# EAGLE board tiny20_2 (EAGLE 4.16)
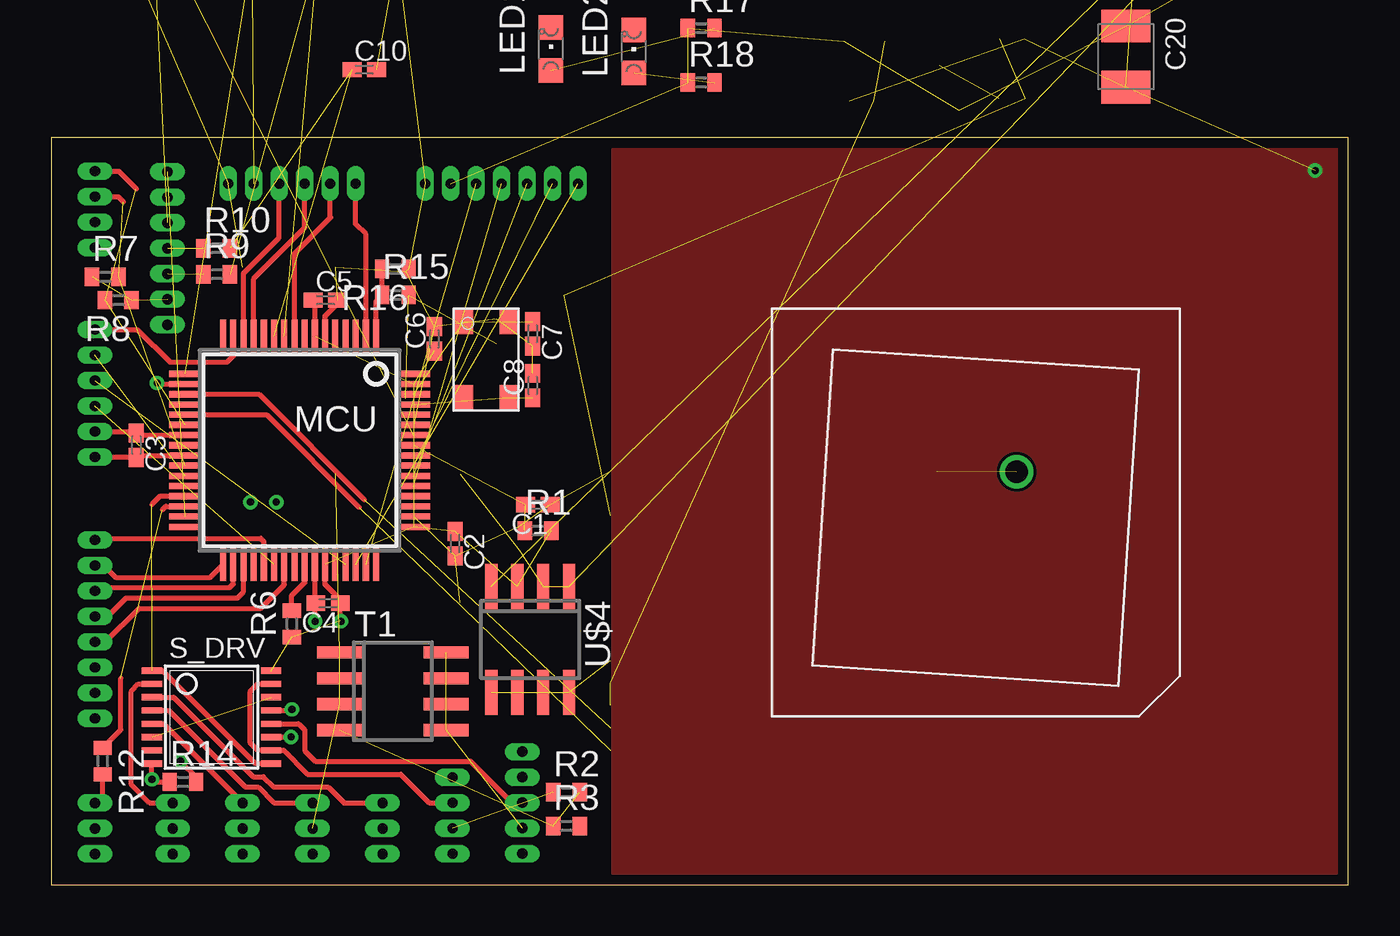
[diagram p0: board, top side]
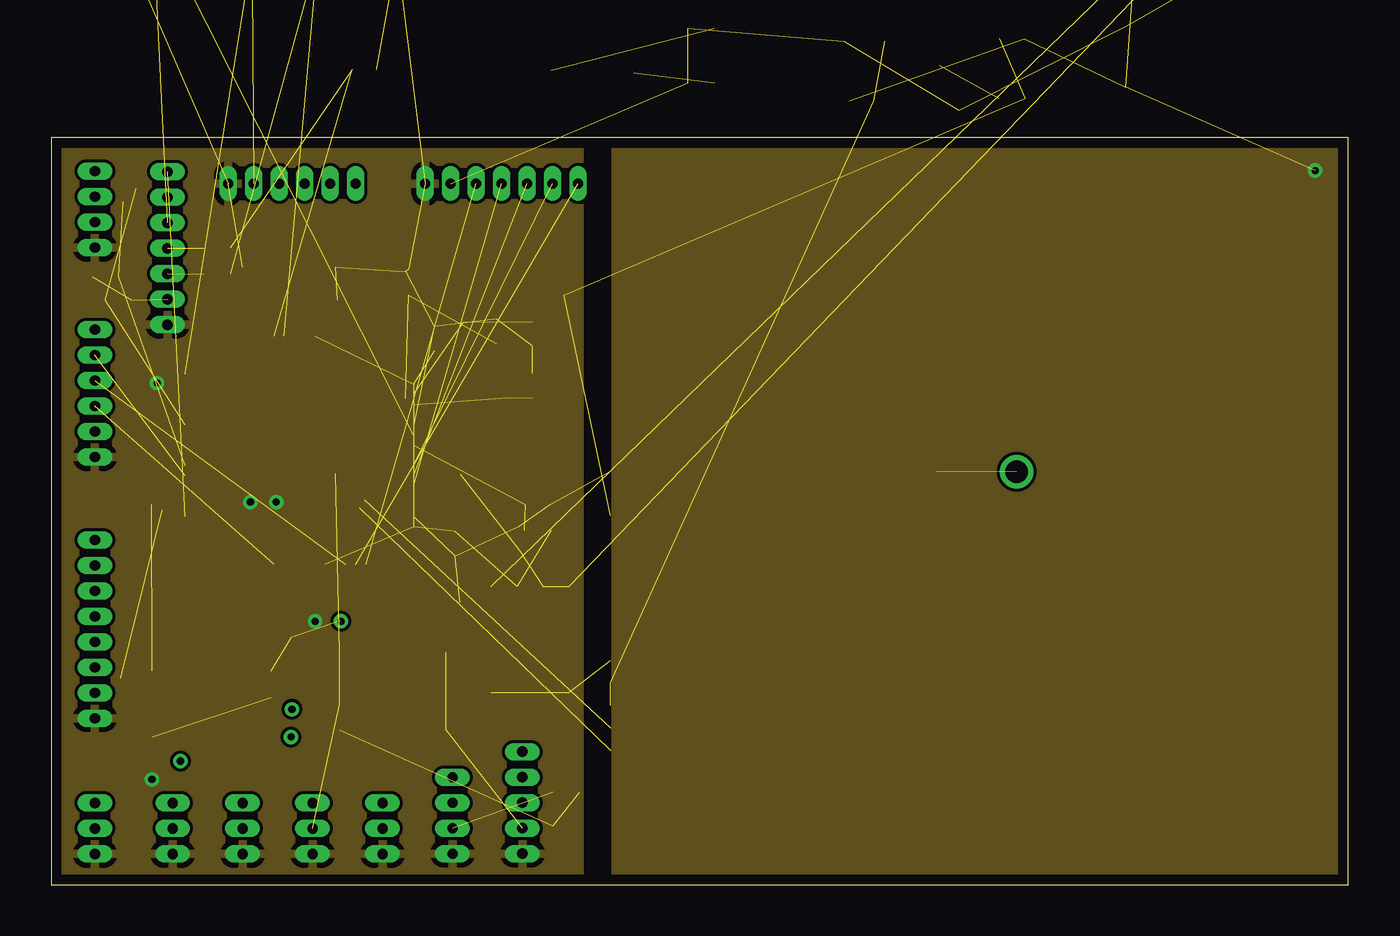
[diagram p1: board, inner layer Route2]
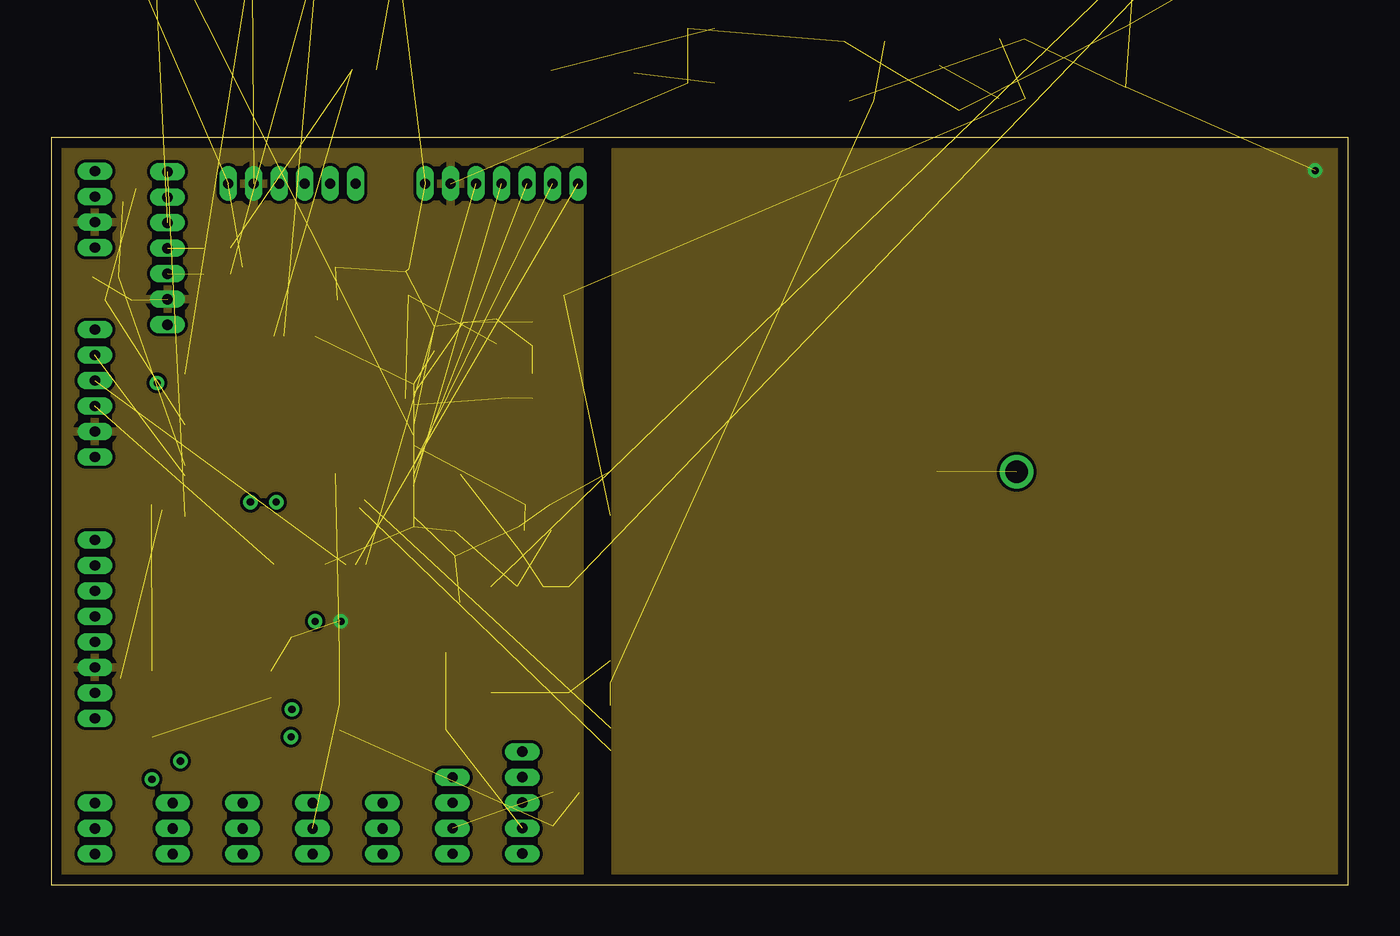
[diagram p2: board, inner layer Route15]
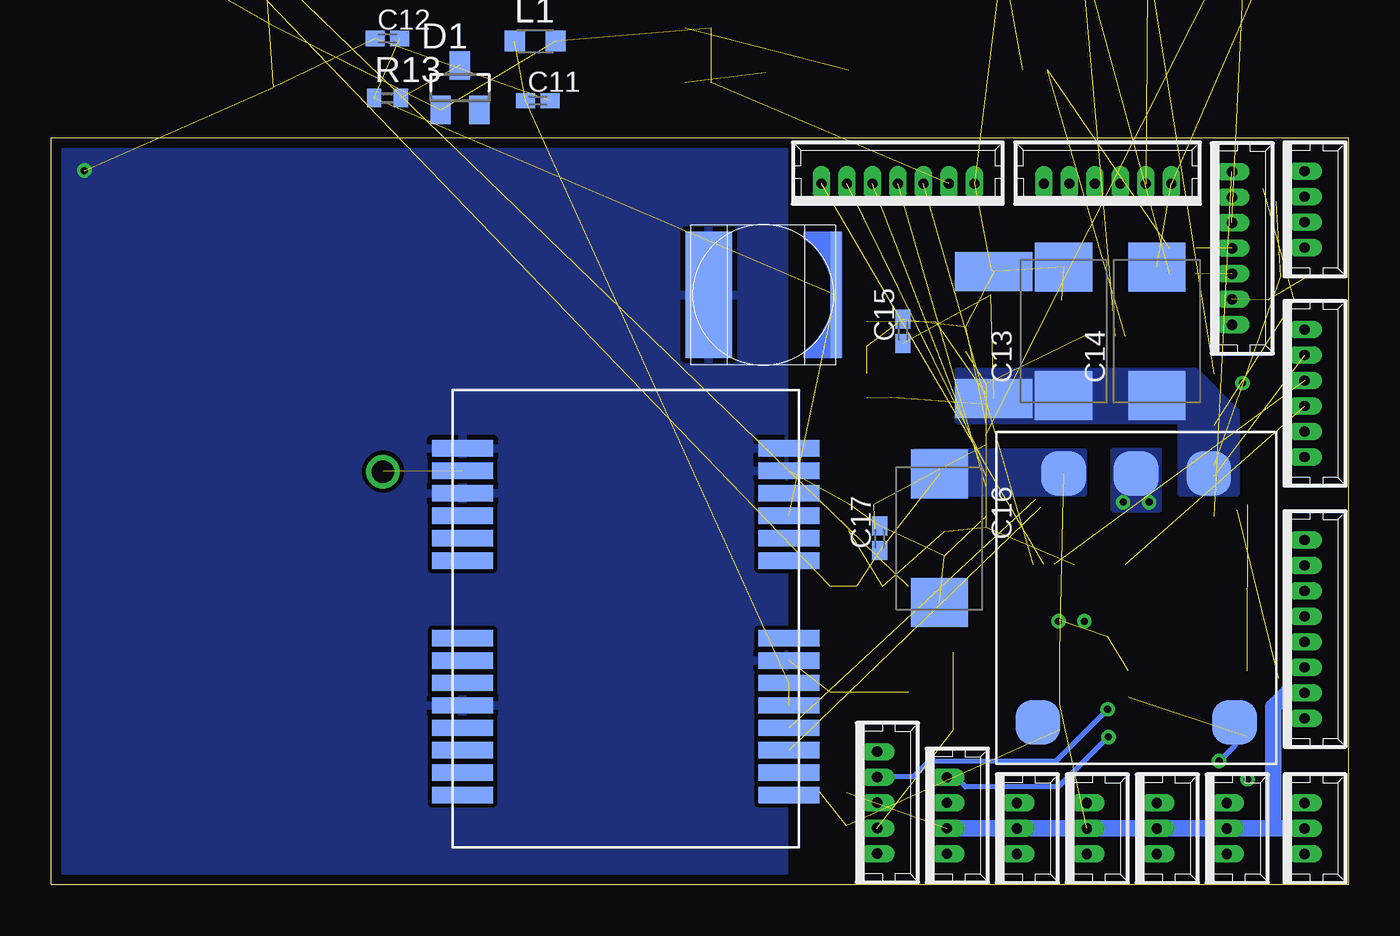
[diagram p3: board, bottom side, seen from below]

Size 63.61 x 36.63 mm. Coordinates in mm from the lower left corner, seen from the top.
Outline: 0,0 63.61,0 63.61,36.63 0,36.63 0,0
Copper layers (1*2+15*16): Top 0.035mm / dielectric 0.2mm / Route2 0.035mm / dielectric 1.5mm / Route15 0.035mm / dielectric 0.2mm / Bottom 0.035mm
Design rules "eurocircuits_verified_4l": minimum track width 0.15mm, minimum drill 0.35mm, track to track 0.15mm, track to pad 0.15mm, pad to pad 0.15mm, via to via 0.15mm, smd to smd 0.15mm, copper to edge 20mil, drill to drill 8mil, minimum pad ring 0.177mm, minimum via ring 0.177mm, stop-mask expansion 4mil, vias tented up to drill 0mil, thermal gap 10mil

## Footprints (pad centres in the part's own frame; a part is rotated, then mirrored left to right if it is on the bottom)
53047-06 = drill 0.5 pad 0.698 long: 1 3.125,0; 2 1.875,0; 3 0.625,0; 4 -0.625,0; 5 -1.875,0; 6 -3.125,0
C0402K = smd 0.925 x 0.74: 1 -0.6,0; 2 0.6,0
SMC_D = smd 2.4 x 2.8: + -3.15,0; - 3.15,0
SMC_B = smd 1.6 x 2.4: + -1.5,0; - 1.5,0
C0805K = smd 1.3 x 1.6: 1 -1,0; 2 1,0
SOT23 = smd 1 x 1.4: 1 -0.95,-1.1; 2 0.95,-1.1; 3 0,1.1
53047-04 = drill 0.5 pad 0.698 long: 1 1.875,0; 2 0.625,0; 3 -0.625,0; 4 -1.875,0
L2012C = smd 1 x 1: 1 -1,0; 2 1,0
CHIPLED_0805 = smd 1.2 x 1.2: A 0,-1.05; C 0,1.05
SQFP-S-10X10-64 = smd 0.3 x 1.6: 1 -3.75,-5.6; 2 -3.25,-5.6; 3 -2.75,-5.6; 4 -2.25,-5.6; 5 -1.75,-5.6; 6 -1.25,-5.6; 7 -0.75,-5.6; 8 -0.25,-5.6; 9 0.25,-5.6; 10 0.75,-5.6; 11 1.25,-5.6; 12 1.75,-5.6; 13 2.25,-5.6; 14 2.75,-5.6; 15 3.25,-5.6; 16 3.75,-5.6; 33 3.75,5.6; 34 3.25,5.6; 35 2.75,5.6; 36 2.25,5.6; 37 1.75,5.6; 38 1.25,5.6; 39 0.75,5.6; 40 0.25,5.6; 41 -0.25,5.6; 42 -0.75,5.6; 43 -1.25,5.6; 44 -1.75,5.6; 45 -2.25,5.6; 46 -2.75,5.6; 47 -3.25,5.6; 48 -3.75,5.6 | smd 1.6 x 0.3: 17 5.6,-3.75; 18 5.6,-3.25; 19 5.6,-2.75; 20 5.6,-2.25; 21 5.6,-1.75; 22 5.6,-1.25; 23 5.6,-0.75; 24 5.6,-0.25; 25 5.6,0.25; 26 5.6,0.75; 27 5.6,1.25; 28 5.6,1.75; 29 5.6,2.25; 30 5.6,2.75; 31 5.6,3.25; 32 5.6,3.75; 49 -5.6,3.75; 50 -5.6,3.25; 51 -5.6,2.75; 52 -5.6,2.25; 53 -5.6,1.75; 54 -5.6,1.25; 55 -5.6,0.75; 56 -5.6,0.25; 57 -5.6,-0.25; 58 -5.6,-0.75; 59 -5.6,-1.25; 60 -5.6,-1.75; 61 -5.6,-2.25; 62 -5.6,-2.75; 63 -5.6,-3.25; 64 -5.6,-3.75
SC59-BEC = smd 1 x 1.4: B -0.95,-1.2; C 0,1.2; E 0.95,-1.2
R0402 = smd 0.7 x 0.9: 1 -0.65,0; 2 0.65,0
R1005 = smd 0.7 x 0.9: 1 -0.65,0; 2 0.65,0
53047-03 = drill 0.5 pad 0.698 long: 1 1.25,0; 2 0,0; 3 -1.25,0
53047-05 = drill 0.5 pad 0.698 long: 1 2.5,0; 2 1.25,0; 3 0,0; 4 -1.25,0; 5 -2.5,0
TSSOP16 = smd 0.305 x 0.991: 1 -2.275,-2.918; 2 -1.625,-2.918; 3 -0.975,-2.918; 4 -0.325,-2.918; 5 0.325,-2.918; 6 0.975,-2.918; 7 1.625,-2.918; 8 2.275,-2.918; 9 2.275,2.918; 10 1.625,2.918; 11 0.975,2.918; 12 0.325,2.918; 13 -0.325,2.918; 14 -0.975,2.918; 15 -1.625,2.918; 16 -2.275,2.918
53047-08 = drill 0.5 pad 0.698 long: 1 4.375,0; 2 3.125,0; 3 1.875,0; 4 0.625,0; 5 -0.625,0; 6 -1.875,0; 7 -3.125,0; 8 -4.375,0
53047-07 = drill 0.5 pad 0.698 long: 1 3.75,0; 2 2.5,0; 3 1.25,0; 4 0,0; 5 -1.25,0; 6 -2.5,0; 7 -3.75,0
PTH = smd 2.184 x 2.184: P$1 -6.096,3.556; P$2 -6.096,0; P$3 -6.096,-3.556; P$4 6.096,4.826; P$5 6.096,-4.826
SOIC8 = smd 0.6 x 2.2: 1 -1.905,-2.6; 2 -0.635,-2.6; 3 0.635,-2.6; 4 1.905,-2.6; 5 1.905,2.6; 6 0.635,2.6; 7 -0.635,2.6; 8 -1.905,2.6
CTS_CRYSTAL = smd 1.2 x 0.9: P$1 -1.85,-1.1; P$2 1.85,-1.1; P$3 1.85,1.1; P$4 -1.85,1.1
LEA-LA = smd 3 x 0.8: 1 8,-8.65; 2 8,-7.55; 3 8,-6.45; 4 8,-5.35; 5 8,-4.25; 6 8,-3.15; 7 8,-2.05; 8 8,-0.95; 9 8,2.85; 10 8,3.95; 11 8,5.05; 12 8,6.15; 13 8,7.25; 14 8,8.35; 15 -8,8.35; 16 -8,7.25; 17 -8,6.15; 18 -8,5.05; 19 -8,3.95; 20 -8,2.85; 21 -8,-0.95; 22 -8,-2.05; 23 -8,-3.15; 24 -8,-4.25; 25 -8,-5.35; 26 -8,-6.45; 27 -8,-7.55; 28 -8,-8.65
PANA_J1_BIS = smd 6.2 x 2.3: MINUS 0,-2.794 | smd 6.198 x 0.508: PLUS 0,3.429
GPS_ANT_SMALL = drill 1.1 pad 1.4 round: P$1 -2,-2
SOLD_PAD_150_75 = smd 3.81 x 1.905: P$1 0,0

## Placement (x,y rotation side)
ANALOG1  [53047-06]  2.15,24.09 270 bottom
ANALOG2  [53047-06]  11.81,34.38 0 bottom
C1  100nF  [C0402K]  23.87,18.63 180 top
C2  100nF  [C0402K]  19.81,16.73 270 top
C3  100nF  [C0402K]  4.19,21.55 270 top
C4  100nF  [C0402K]  13.58,13.81 180 top
C5  100nF  [C0402K]  13.46,28.66 0 top
C6  100nF  [C0402K]  18.79,26.76 90 top
C7  22pF  [C0402K]  23.62,27.01 270 top
C8  22pF  [C0402K]  23.62,24.47 90 top
C9  18pF  [C0402K]  16.38,45.55 0 top  (outside the outline)
C10  18pF  [C0402K]  15.36,39.97 0 top  (outside the outline)
C11  100nF  [C0402K]  39.75,38.44 0 bottom
C12  18pF  [C0402K]  47.11,41.49 0 bottom  (outside the outline)
C13  47uF  [SMC_D]  13.97,27.14 90 bottom
C14  47uF  [SMC_D]  9.39,27.14 90 bottom
C15  100nF  [C0402K]  21.84,27.14 90 bottom
C16  100uF  [SMC_D]  20.06,16.98 270 bottom
C17  100nF  [C0402K]  22.98,16.98 90 bottom
C18  470pF  [C0402K]  52.45,43.9 0 top  (outside the outline)
C19  100nF  [C0402K]  58.67,45.17 0 top  (outside the outline)
C20  22uF  [SMC_B]  52.7,40.6 270 top
C21  1uF  [C0805K]  54.48,45.94 0 top  (outside the outline)
D1  BAS70  [SOT23]  43.56,39.08 0 bottom
I2C  [53047-04]  2.15,33.11 270 bottom
L1  0.47uH  [L2012C]  39.87,41.36 0 bottom  (outside the outline)
LED1  [CHIPLED_0805]  24.51,40.98 0 top  (outside the outline)
LED2  [CHIPLED_0805]  28.57,40.86 0 top  (outside the outline)
MCU  LPC2148  [SQFP-S-10X10-64]  12.19,21.3 180 top
Q1  DDTA143  [SC59-BEC]  8.63,46.44 90 top  (outside the outline)
R1  10k  [R0402]  23.87,17.36 0 top
R2  10k  [R0402]  25.27,4.53 0 top
R3  1k  [R0402]  25.27,2.88 0 top
R4  10k  [R1005]  4.44,47.33 0 top  (outside the outline)
R5  10k  [R1005]  4.44,45.68 0 top  (outside the outline)
R6  10k  [R0402]  11.81,12.79 90 top
R7  10k  [R0402]  2.66,29.81 0 top
R8  10k  [R0402]  3.3,28.66 180 top
R9  33R  [R1005]  8.12,29.93 0 top
R10  33R  [R1005]  8.12,31.2 0 top
R11  1.5K  [R1005]  12.44,45.68 0 top  (outside the outline)
R12  100R  [R0402]  2.54,6.06 270 top
R13  150R  [R0402]  47.11,38.57 0 bottom
R14  348R  [R0402]  6.47,5.04 0 top
R15  15k  [R0402]  16.89,28.92 0 top
R16  3.3k  [R0402]  16.89,30.19 180 top
R17  10k  [R0402]  31.87,42 0 top  (outside the outline)
R18  10k  [R0402]  31.87,39.33 0 top
RCRX  [53047-03]  2.15,2.76 270 bottom
S1  [53047-03]  9.39,2.76 270 bottom
S2  [53047-03]  12.82,2.76 270 bottom
S3  [53047-03]  16.25,2.76 270 bottom
S4-7  [53047-04]  19.68,3.39 270 bottom
S6-5/AUX  [53047-05]  23.11,4.03 270 bottom
S8  [53047-03]  5.96,2.76 270 bottom
S_DRV  CD4015B  [TSSOP16]  7.87,8.22 270 top
SERIAL  [53047-08]  2.15,12.54 270 bottom
SPI  [53047-07]  22.09,34.38 0 bottom
SUP1  PTH  [PTH]  10.41,14.06 270 bottom
T1  TPS1100  [SOIC8]  16.76,9.49 270 top
U$1  CRYSTAL_CTS  [CTS_CRYSTAL]  21.33,25.74 90 top
U$2  LEA-4P  [LEA-LA]  35.43,13.04 0 bottom
U$4  MIC5209  [SOIC8]  23.49,12.03 180 top
U$8  PANA_GOLDCAP_J1ROUND  [PANA_J1_BIS]  28.57,28.92 270 bottom
U$10  GPS_PATCH  [GPS_ANT_SMALL]  45.33,18.25 180 top
U$15  SOLDER_PAD150_75  [SOLD_PAD_150_75]  17.39,23.84 0 bottom
U$16  SOLDER_PAD150_75  [SOLD_PAD_150_75]  17.39,30.06 0 bottom
USB  [53047-07]  5.71,31.2 270 bottom

## Library data of the parts
ANALOG1 ANALOG2 I2C RCRX S1-S3 S4-7 S6-5/AUX S8 SERIAL SPI USB = con-molex
C1-C21 L1 R1-R18 = rcl
D1 = diode
LED1 LED2 = led
MCU S_DRV SUP1 T1 U$1 U$2 U$4 U$8 U$10 U$15 U$16 = paparazzi
Q1 = transistor-pnp

## Nets
+3V3: ANALOG1.2 ANALOG2.2 C2.1 C3.1 C4.1 C5.1 C6.1 C19.1 C20.+ D1.1 I2C.2 L1.2 MCU.7 MCU.23 MCU.43 MCU.49 MCU.51 MCU.63 Q1.E R1.2 R6.1 R7.1 R8.1 R17.1 R18.1 S_DRV.16 SERIAL.3 SPI.2 U$4.3 USB.2
+5V: C16.+ C17.1 C21.2 R2.1 RCRX.2 S1.2 S2.2 S3.2 S4-7.2 S8.2 SERIAL.2 SUP1.P$3 T1.1 T1.2 T1.3 U$4.1 U$4.2
ADC1: ANALOG1.3 MCU.38
ADC2: ANALOG1.4 MCU.45
ADC3: ANALOG1.5 MCU.27
ADC4: ANALOG1.6 MCU.15
ADC5: ANALOG2.3 MCU.14
ADC6: ANALOG2.4 MCU.13
ADC7: ANALOG2.5 MCU.9
ADC8: ANALOG2.6 MCU.2
AUX: S6-5/AUX.2 T1.5 T1.6 T1.7 T1.8
BUTTON: MCU.31 USB.7
C12: C12.2 R13.1 U$2.11 U$8.PLUS
CAM_SW: S6-5/AUX.5
CTS: MCU.37 SERIAL.8
DRDY: MCU.46 SPI.7
DTR: MCU.39 SERIAL.4
GND: ANALOG1.1 ANALOG2.1 C1.1 C2.2 C3.2 C4.2 C5.2 C6.2 C7.2 C8.2 C9.2 C10.2 C11.2 C12.1 C13.- C14.- C15.2 C16.- C17.2 C18.2 C19.2 C20.- C21.1 I2C.1 MCU.6 MCU.18 MCU.25 MCU.42 MCU.50 MCU.59 R5.1 R14.1 R16.1 RCRX.1 S1.1 S2.1 S3.1 S4-7.1 S6-5/AUX.1 S8.1 S_DRV.8 SERIAL.1 SPI.1 SUP1.P$2 U$2.7 U$2.13 U$2.14 U$2.15 U$2.17 U$2.24 U$4.5 U$4.6 U$4.7 U$4.8 U$8.MINUS U$16.P$1 USB.1
GPS_RESET: U$2.10
GPS_RXD: MCU.19 U$2.4
GPS_TXD: MCU.21 U$2.3
LED1: LED1.C
LED2: LED2.C
LED3: USB.6
MISO: MCU.53 SPI.4
MOSI: MCU.54 SPI.5
N$1: C7.1 MCU.62 U$1.P$3
N$2: C11.1 L1.1 U$2.5 U$2.6
N$3: D1.3 R13.2
N$4: U$2.16 U$10.P$1
N$5: R14.2 SUP1.P$4
N$6: C18.1 U$4.4
N$7: LED1.A R17.2
N$8: LED2.A R18.2
N$9: C8.1 MCU.61 U$1.P$1
N$10: MCU.30 R12.1
N$14: Q1.C R11.1
N$15: MCU.41 R6.2
N$21: R2.2 R3.1 T1.4
N$64: C1.2 MCU.57 R1.1
PPM_IN: R12.2 RCRX.3
PWR_SW: R3.2
RTS: MCU.35 SERIAL.5
RXD: MCU.34 SERIAL.6
S1: S1.3 S_DRV.5
S2: S2.3 S_DRV.4
S3: S3.3 S_DRV.3
S4: S4-7.3 S_DRV.10 S_DRV.15
S5: S6-5/AUX.4 S_DRV.13
S6: S6-5/AUX.3 S_DRV.12
S7: S4-7.4 S_DRV.11
S8: S8.3 S_DRV.2
SCK: MCU.47 SPI.3
SCL: I2C.4 MCU.22 R8.2
SDA: I2C.3 MCU.26 R7.2
SERV_CLK: MCU.29 S_DRV.1 S_DRV.9
SERV_DATA: S_DRV.7
SERV_RESET: S_DRV.6 S_DRV.14
SSEL: MCU.55 SPI.6
TXD: MCU.33 SERIAL.7
USB+: R9.1 USB.3
USB-: R10.1 USB.4
USB_CONNECT: MCU.17 Q1.B
USB_N: C10.1 MCU.11 R10.2
USB_P: C9.1 MCU.10 R9.2 R11.2
USB_VBUS_3V3: MCU.58 R4.2
USB_VBUS_5V: R4.1 R5.2 USB.5
VANT: U$2.19
VBAT: C13.+ C14.+ C15.1 R15.2 SUP1.P$1 U$15.P$1
VBAT_MEAS: MCU.1 R15.1 R16.2
VCC_RF: U$2.18
VDD18OUT: U$2.8

## Tracks (layer width: path | path; a pad name or v marks a point on that pad's centre or on a via)
+3V3  (via drill 0.35)  (19 unrouted)
  Top 0.254: MCU.23 4.33,22.05 4.19,22.19 | 4.19,22.19 C3.1 | ANALOG1.2 4.16,22.22 4.19,22.19 | MCU.43 13.44,14.71 14.22,13.93 14.18,13.9 C4.1 14.18,12.95 v14.22,12.92 | C5.1 12.82,28.66 12.94,28.55 MCU.7
  pour Route15: 0.38,0.47 25.9,0.47 25.9,36.16 0.38,36.16
+5V  (9 unrouted)
  Bottom 0.813: RCRX.2 3.68,2.76 | 3.68,2.76 S8.2 S1.2 S2.2 S3.2 S4-7.2 | 3.68,2.76 3.68,8.73 2.99,9.41 SERIAL.2
  pour Bottom (isolate 0.203, no thermals): 21.2,21.3 12.95,21.3 12.95,19.14 21.2,19.14
ADC1  (1 unrouted)
ADC2  (1 unrouted)
ADC3  (1 unrouted)
ADC4
  Top 0.254: ANALOG1.6 4.24,27.22 5.84,25.62 8.63,25.62 8.94,25.92 MCU.15
ADC5
  Top 0.254: MCU.14 9.44,29.98 11.18,31.72 ANALOG2.3
ADC6
  Top 0.254: MCU.13 9.94,29.72 12.44,32.22 12.43,32.23 ANALOG2.4
ADC7
  Top 0.254: MCU.9 11.94,30.95 13.71,32.73 13.68,32.76 ANALOG2.5
ADC8
  Top 0.254: MCU.2 15.44,31.89 14.93,32.4 ANALOG2.6
AUX  (4 unrouted)
BUTTON  (1 unrouted)
C12  (3 unrouted)
CTS
  Top 0.254: MCU.37 10.44,16.82 10.28,16.98 2.28,16.98 2.15,16.85 SERIAL.8
DRDY  (1 unrouted)
DTR
  Top 0.254: MCU.39 11.44,14.71 10.28,13.55 4.31,13.55 2.66,11.9 2.65,11.91 SERIAL.4
GND  (via drill 0.35)  (29 unrouted)
  Top 0.254: MCU.25 4.32,21.05 4.31,21.04 | 4.31,21.04 4.19,20.92 C3.2 4.22,20.95 4.31,21.04 | ANALOG1.1 4.24,20.97 4.31,21.04 | R14.1 5.08,5.04 v4.95,5.17 S_DRV.8 | MCU.42 12.94,13.82 12.95,13.81 | 12.95,13.81 C4.2 | v12.95,12.92 12.95,13.81 | C5.2 14.22,28.66 13.44,27.88 MCU.6 | MCU.18 5.25,24.55 v5.2,24.6
  other vias: 61.97,35.01 9.77,18.76 11.04,18.76
  pour Top: 27.68,0.47 63.11,0.47 63.11,36.03 27.68,36.03
  pour Bottom (isolate 0.203): 27.68,36.03 63.11,36.03 63.11,0.47 27.68,0.47
  pour Route2: 0.38,0.47 25.9,0.47 25.9,36.16 0.38,36.16
  pour Route15: 27.68,36.03 63.11,36.03 63.11,0.47 27.68,0.47
  pour Route2: 27.68,36.03 63.11,36.03 63.11,0.47 27.68,0.47
  pour Bottom (isolate 0.203, no thermals): 9.27,21.3 11.55,21.3 11.55,18.38 9.27,18.38
GPS_RXD  (1 unrouted)
  Top 0.254: MCU.19 10.2,24.05 15.36,18.88
GPS_TXD  (1 unrouted)
  Top 0.254: MCU.21 10.56,23.05 15.11,18.5
MISO  (1 unrouted)
MOSI  (1 unrouted)
N$1  (2 unrouted)
N$2  (3 unrouted)
N$3  (1 unrouted)
N$4  (1 unrouted)
N$5  (via drill 0.35)
  Top 0.254: R14.2 7.12,5.28 v6.34,6.06
  Bottom 0.254: v6.34,6.06 5.58,6.82 SUP1.P$4
N$6  (1 unrouted)
N$7  (1 unrouted)
N$8  (1 unrouted)
N$9  (2 unrouted)
N$10  (1 unrouted)
  Top 0.254: R12.1 3.42,7.6 3.42,10.12 | MCU.30 5.63,18.55 5.46,18.38
N$14  (1 unrouted)
N$15
  Top 0.254: MCU.41 12.44,14.82 11.81,14.19 R6.2 11.81,13.55
N$21  (2 unrouted)
N$64  (2 unrouted)
PPM_IN
  Top 0.254: 2.54,5.42 R12.2 2.54,4.39 RCRX.3
RTS
  Top 0.254: SERIAL.5 2.78,13.16 3.68,14.06 9.14,14.06 9.44,14.36 MCU.35
RXD
  Top 0.254: MCU.34 8.94,14.75 8.76,14.57 2.28,14.57 2.15,14.44 SERIAL.6
S1
  Top 0.254: S_DRV.5 5.53,7.89 9.39,4.03 S1.3
S2
  Top 0.254: S_DRV.4 5.77,8.54 9.52,4.79 10.16,4.79 10.92,4.03 12.82,4.03 S2.3
S3
  Top 0.254: S_DRV.3 6,9.19 9.9,5.3 10.41,5.3 10.92,4.79 13.58,4.79 14.37,4.01 S3.3
S4
  Top 0.254: S4-7.3 18.54,4.02 18.54,4.03 17.14,5.42 12.57,5.42 11.4,6.59 S_DRV.10 10.13,6.59 9.77,6.95 9.77,9.49 10.13,9.84 S_DRV.15
S5  (via drill 0.35)
  Top 0.254: S_DRV.13 11.75,8.54 v11.81,8.6
  Bottom 0.254: v11.81,8.6 14.35,6.06 20.57,6.06 21.33,5.3 23.11,5.3 S6-5/AUX.4
S6
  Top 0.254: S_DRV.12 12.13,7.89 12.44,7.58 12.44,6.57 12.95,6.06 20.57,6.06 22.6,4.03 S6-5/AUX.3
S7  (via drill 0.35)
  Top 0.254: S_DRV.11 v11.77,7.24
  Bottom 0.254: v11.77,7.24 14.22,4.79 18.79,4.79 19.17,5.17 19.55,5.17 19.68,5.3 S4-7.4
S8
  Top 0.254: S8.3 5.96,4.03 4.82,4.03 3.93,4.92 3.93,9.49 4.29,9.84 S_DRV.2
SCK  (1 unrouted)
SCL  (2 unrouted)
  Top 0.254: I2C.4 3.33,34.98 4.19,34.12
SDA  (2 unrouted)
  Top 0.254: I2C.3 3.31,33.73 3.55,33.49
SERV_CLK  (1 unrouted)
  Top 0.254: S_DRV.1 5.47,10.49 10.02,5.94 S_DRV.9 | MCU.29 5.37,19.05 4.95,18.63
SERV_RESET  (1 unrouted)
SSEL  (1 unrouted)
TXD
  Top 0.254: MCU.33 7.81,15.08 3.17,15.08 2.66,15.58 2.28,15.58 2.15,15.71 SERIAL.7
USB+  (1 unrouted)
USB-  (1 unrouted)
USB_CONNECT  (1 unrouted)
USB_N  (2 unrouted)
USB_P  (3 unrouted)
USB_VBUS_3V3  (1 unrouted)
USB_VBUS_5V  (2 unrouted)
VBAT  (2 unrouted)
  pour Bottom (isolate 0.203, no thermals): 19.17,25.23 7.49,25.23 5.46,23.2 5.46,19.14 8.25,19.14 8.25,22.7 19.17,22.7
VBAT_MEAS
  Top 0.254: MCU.1 15.94,28.6 16.25,28.92 | 16.25,28.92 R15.1 | R16.2 16.24,28.93 16.25,28.92